# EAGLE board CIRCUIT (EAGLE 9.7.0)

Size 223.58 x 137.88 mm. Coordinates in mm from the lower left corner, seen from the top.
Outline: 0,0 223.58,0 223.58,137.88 0,137.88 0,0
Copper layers (1*16): Top 0.035mm / dielectric 1.5mm / Bottom 0.035mm
Design rules "default": minimum track width 6mil, minimum drill 0.35mm, track to track 6mil, track to pad 6mil, pad to pad 6mil, via to via 6mil, smd to smd 6mil, copper to edge 40mil, drill to drill 6mil, minimum pad ring 10mil, minimum via ring 8mil, stop-mask expansion 4mil, vias tented up to drill 0mil, thermal gap 10mil

## Footprints (pad centres in the part's own frame; a part is rotated, then mirrored left to right if it is on the bottom)
BATTERY-GENERIC = drill 1.118 pad 3.15 octagon: + 2.54,0; - -2.54,0
RESAD1016W63L850D250B = drill 0.83 pad 1.43: 1 -5.08,0; 2 5.08,0
HA-06-SM065 = drill 1 pad 1.676: 1 -2.54,-2.54; 2 0,2.54; 3 2.54,-2.54
SWITCH-MOMENTARY-PTH-6.5MM = drill 1.016 pad 1.88: 1 -3.251,2.261; 2 3.251,2.261; 3 -3.251,-2.261; 4 3.251,-2.261
SG90 = drill 1.016 long: 1 -2.54,0; 2 0,0; 3 2.54,0
JHD-162A = drill 1.016 long: 1 -19.05,0; 2 -16.51,0; 3 -13.97,0; 4 -11.43,0; 5 -8.89,0; 6 -6.35,0; 7 -3.81,0; 8 -1.27,0; 9 1.27,0; 10 3.81,0; 11 6.35,0; 12 8.89,0; 13 11.43,0; 14 13.97,0; 15 16.51,0; 16 19.05,0
ARDUINO-UNO-R3-SHIELD = drill 1.016 pad 1.88: 3.3V 24.13,-2.54; 5V 24.13,0; A0 24.13,12.7; A1 24.13,15.24; A2 24.13,17.78; A3 24.13,20.32; A4 24.13,22.86; A5 24.13,25.4; AREF -24.13,-13.97; D2 -24.13,20.32; D3 -24.13,17.78; D4 -24.13,15.24; D5 -24.13,12.7; D6 -24.13,10.16; D7 -24.13,7.62; D8 -24.13,3.81; D9 -24.13,1.27; D10 -24.13,-1.27; D11 -24.13,-3.81; D12 -24.13,-6.35; D13 -24.13,-8.89; GND@0 24.13,2.54; GND@1 24.13,5.08; GND@2 -24.13,-11.43; IOREF 24.13,-7.62; NC 24.13,-10.16; RES 24.13,-5.08; RX -24.13,25.4; SCL -24.13,-19.05; SDA -24.13,-16.51; TX -24.13,22.86; VIN 24.13,7.62

## Placement (x,y rotation side)
P1  BATTERYGENERIC  [BATTERY-GENERIC]  152.1,129.62 180 top
R1  220  [RESAD1016W63L850D250B]  148.69,94 270 top
RPOT3  250k  [HA-06-SM065]  110.59,68.6 0 top
S1  SWITCH_MOMENTARY  [SWITCH-MOMENTARY-PTH-6.5MM]  163.93,77.49 90 top
S2  SWITCH_MOMENTARY  [SWITCH-MOMENTARY-PTH-6.5MM]  171.55,77.49 90 top
S3  SWITCH_MOMENTARY  [SWITCH-MOMENTARY-PTH-6.5MM]  156.31,77.49 90 top
SERVO1  SERVOSG90  [SG90]  196.53,101.74 0 top
SERVO2  SERVOSG90  [SG90]  216.6,102.07 0 top
U1  LCD-16X2JHD-162A  [JHD-162A]  132.51,36.63 0 top
U3  ARDUINO-UNO-R3-SHIELD  [ARDUINO-UNO-R3-SHIELD]  47.88,78.65 270 top

## Library data of the parts
P1 R1 RPOT3 S1-S3 SERVO1 SERVO2 U1 U3 = Tinkercad

## Nets
P1+: P1.+ R1.1 RPOT3.1 SERVO1.2 SERVO2.2 U1.2 U3.5V
P1-: P1.- RPOT3.3 S1.3 S1.4 S2.3 S2.4 S3.3 S3.4 SERVO1.1 SERVO2.1 U1.1 U1.5 U1.16 U3.GND@0 U3.GND@1 U3.GND@2
U1_LED+: R1.2 U1.15
U1_VO: RPOT3.2 U1.3
U3_D2: U1.14 U3.D2
U3_D3: U1.13 U3.D3
U3_D4: U1.12 U3.D4
U3_D5: U1.11 U3.D5
U3_D6: S1.1 S1.2 U3.D6
U3_D7: S3.1 S3.2 U3.D7
U3_D8: S2.1 S2.2 U3.D8
U3_D9: SERVO1.3 SERVO2.3 U3.D9
U3_D11: U1.6 U3.D11
U3_D12: U1.4 U3.D12

## Tracks (layer width: path | path; a pad name or v marks a point on that pad's centre or on a via)
P1+  (6 unrouted)
P1-  (15 unrouted)
U1_LED+  (1 unrouted)
U1_VO  (1 unrouted)
U3_D2  (1 unrouted)
U3_D3  (1 unrouted)
U3_D4  (1 unrouted)
U3_D5  (1 unrouted)
U3_D6  (2 unrouted)
U3_D7  (2 unrouted)
U3_D8  (2 unrouted)
U3_D9  (2 unrouted)
U3_D11  (1 unrouted)
U3_D12  (1 unrouted)